# Allegro board SDR_2832 - crystal.brd
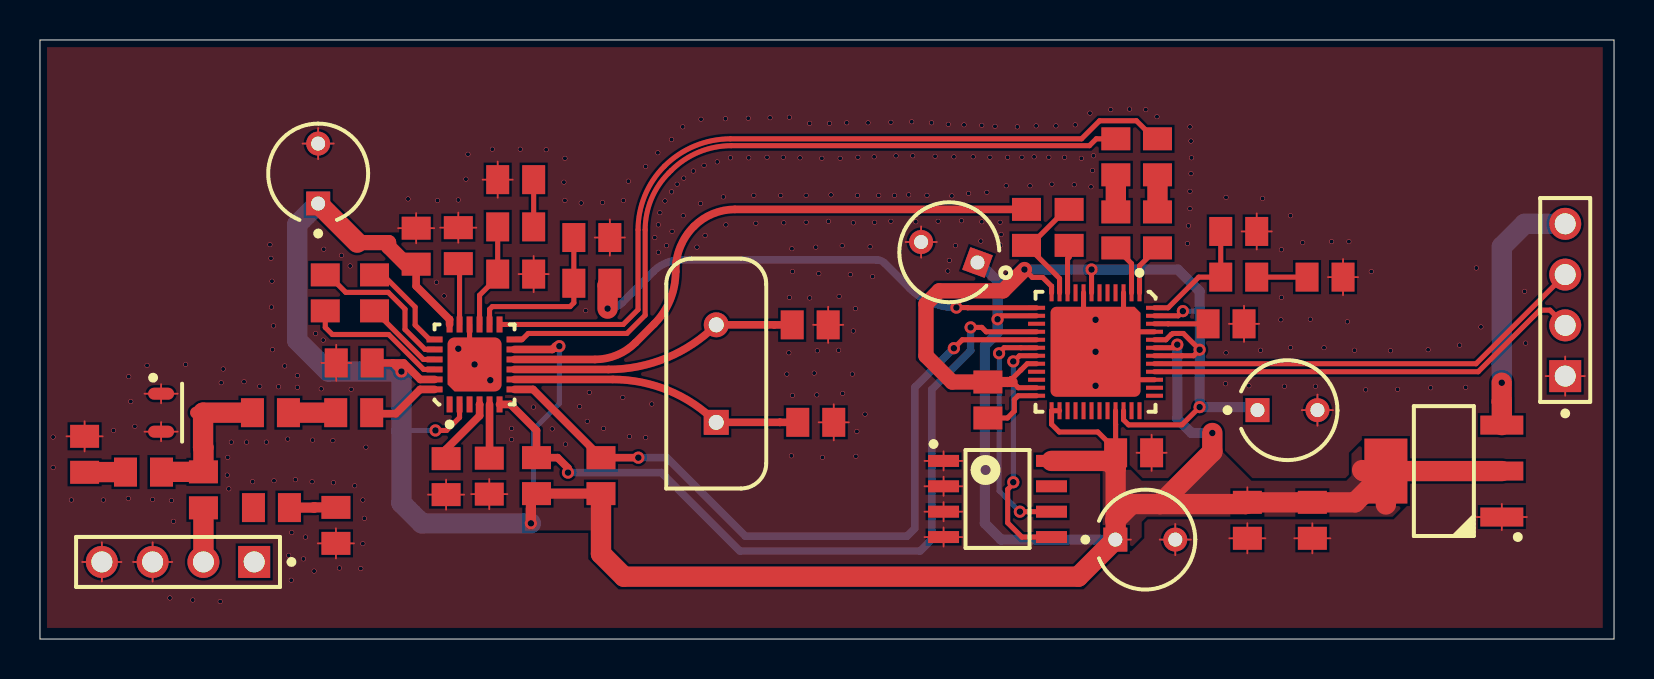
[diagram p0: board, top side]
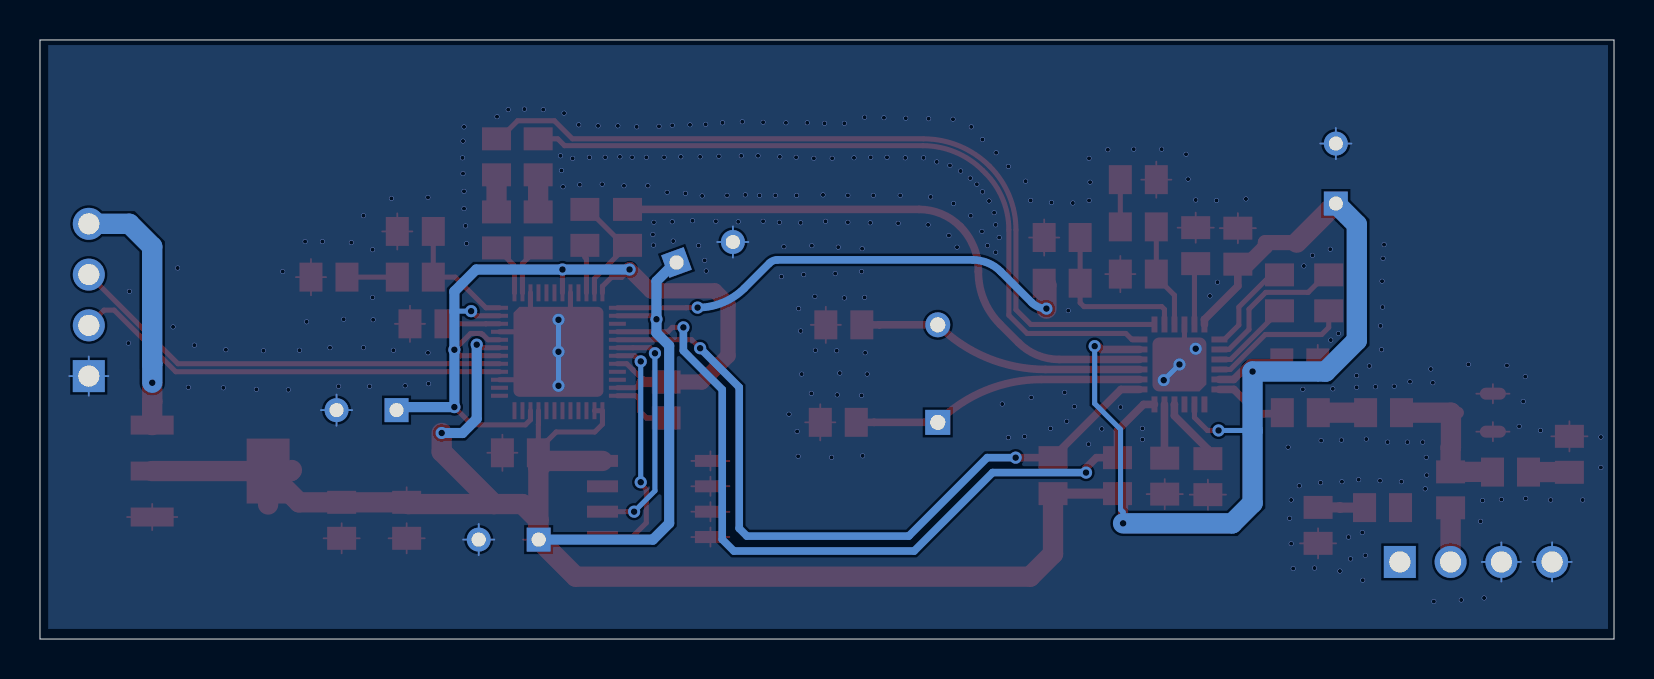
[diagram p1: board, bottom side, seen from below]

Outline 78.74 x 29.97 mm; copper layers: TOP, BOTTOM. Coordinates in mm from the lower left corner of the outline.
Outline path: 0,29.97 78.74,29.97 78.74,0 0,0 0,29.97

## Placement (name value [footprint] x y rotation side)
C1  330pF  [R0805]  11.53 11.33 0 top
C2  220pF/NC  [R0805]  2.23 9.24 270 top
C3  27pF/10nF  [R0805]  8.18 7.46 90 top
C4  NC/100nF  [R0805]  14.8 5.69 270 top
C5  1uF  [R0805]  20.32 8.12 90 top
C6  100nF  [R0805]  22.48 8.15 90 top
C7  20pF  [R0805]  38.81 10.84 180 top
C8  20pF  [R0805]  38.53 15.72 180 top
C9  10nF  [R0805]  15.72 13.81 180 top
C10  100nF  [R0805]  18.82 19.66 90 top
C11  100nF  [R0805]  20.93 19.68 270 top
C12  330nF  [R0805]  23.8 18.26 180 top
C13  6.8nF  [R0805]  23.8 22.98 0 top
C14  100nF  [R0805]  53.82 20.47 90 top
C15  100nF  [R0805]  55.9 20.47 90 top
C16  100nF  [R0805]  27.61 20.09 0 top
C17  220uF  [CAPPRD300W51D500H1295P]  62.4 11.45 0 top
C18  6.8nF/NC  [R0805]  49.35 20.6 90 top
C19  10uF  [CAPPRD300W51D500H1295P]  13.92 23.29 90 top
C20  0.1uF  [CAPPRD300W51D500H1295P]  55.29 4.98 0 top
C22  330nF  [R0805]  59.97 20.39 180 top
C23  6.8nF  [R0805]  64.28 18.11 180 top
C26  100nF  [R0805]  59.33 15.77 0 top
C27  100nF  [R0805]  54.71 9.32 180 top
C28  100nF  [R0805]  63.65 5.94 270 top
C29  330pF  [R0805]  60.4 5.94 90 top
C30  10uF  [CAPPRD300W51D500H1295P]  45.49 19.35 160 top
D1  BAV99/SOT  [SOT95P237X112-3N]  7.11 11.33 0 top
J1  HEADER 4  [HDRV4W64P254_1X4_1016X254X838P]  76.3 13.15 90 top
J2  HEADER 4  [HDRV4W64P254_1X4_1016X254X838P]  10.72 3.86 180 top
L1  8.2nH  [R0805]  15.69 11.33 0 top
L2  100nH/NC  [R0805]  5.18 8.35 0 top
L3  NC/180nH  [R0805]  11.58 6.58 0 top
L4  150nH  [R0805]  14.27 17.32 90 top
L5  150nH  [R0805]  16.74 17.32 90 top
L6  4.7uH  [R0805]  47.42 11.96 90 top
R2  1.8K  [R0805]  23.8 20.62 0 top
R3  10K  [R0805]  27.61 17.8 0 top
R4  220  [R0805]  55.9 24.13 270 top
R5  220  [R0805]  53.82 24.13 270 top
R7  NC/100  [R0805]  51.48 20.6 270 top
R8  1.8K  [R0805]  59.97 18.11 0 top
R9  4.7K  [R0805]  28.06 8.18 90 top
R10  4.7K  [R0805]  24.84 8.18 270 top
U1  RTL2832U  [RTL2832U_QFN48]  52.8 14.37 270 top
U2  R820t  [R820T]  21.74 13.74 90 top
U3  24C02/SO8  [AT24C02_SOP8]  47.9 7.01 0 top
U4  AMS1117  [AMS1117_SOT223]  70.23 8.4 180 top
Y1  28.8MHz  [OSC488W45P254L500H368Q2P]  33.83 13.28 90 top

## Library data of the parts
C1-C16 C18 C22 C23 C26-C29 = CAPACITOR NON-POL
C17 C19 C20 C30 = CAP
D1 = BAV99/SOT
J1 J2 = HEADER 4
L1-L6 = INDUCTOR AUDIO
R2-R5 R7-R10 = R
U1 = RTL2832U
U2 = R820t
U3 = 24C02/SO8_0
U4 = AMS1117
Y1 = CRYSTAL

## Footprints (pads in the part's own frame, mm; a bottom-side part is the same pattern mirrored in y, then rotated)
AMS1117_SOT223
  rect 2.15x0.95 smd: 1(-2.9,2.3) 2(-2.9,0) 3(-2.9,-2.3)
  rect 2.15x3.25 smd: 4(2.9,0)
AT24C02_SOP8
  rect 1.55x0.6 smd: 1(-2.7,1.905) 2(-2.7,0.635) 3(-2.7,-0.635) 4(-2.7,-1.905) 5(2.7,-1.905) 6(2.7,-0.635) 7(2.7,0.635) 8(2.7,1.905)
CAPPRD300W51D500H1295P
  rect 1.2x1.2 hole 0.7: 1(-1.5,0)
  round 1.2 hole 0.7: 2(1.5,0)
HDRV4W64P254_1X4_1016X254X838P
  rect 1.6x1.6 hole 1.05: 1(0,0)
  round 1.6 hole 1.05: 2(2.54,0) 3(5.08,0) 4(7.62,0)
OSC488W45P254L500H368Q2P
  rect 1.25x1.25 hole 0.75: 1(-2.44,0)
  round 1.25 hole 0.75: 2(2.44,0)
R0805
  rect 1.15x1.45 smd: 1(-0.9,0) 2(0.9,0)
R820T
  rect 0.8x0.3 smd: 1(-2,1.25) 2(-2,0.75) 3(-2,0.25) 4(-2,-0.25) 5(-2,-0.75) 6(-2,-1.25) 13(2,-1.25) 14(2,-0.75) 15(2,-0.25) 16(2,0.25) 17(2,0.75) 18(2,1.25)
  rect 0.3x0.8 smd: 7(-1.25,-2) 8(-0.75,-2) 9(-0.25,-2) 10(0.25,-2) 11(0.75,-2) 12(1.25,-2) 19(1.25,2) 20(0.75,2) 21(0.25,2) 22(-0.25,2) 23(-0.75,2) 24(-1.25,2)
  custom 2.7x2.7 smd: 25(0,0)
RTL2832U_QFN48
  rect 0.85x0.2 smd: 1(-2.95,2.2) 2(-2.95,1.8) 3(-2.95,1.4) 4(-2.95,1) 5(-2.95,0.6) 6(-2.95,0.2) 7(-2.95,-0.2) 8(-2.95,-0.6) 9(-2.95,-1) 10(-2.95,-1.4) 11(-2.95,-1.8) 12(-2.95,-2.2) 25(2.95,-2.2) 26(2.95,-1.8) 27(2.95,-1.4) 28(2.95,-1) 29(2.95,-0.6) 30(2.95,-0.2) 31(2.95,0.2) 32(2.95,0.6) 33(2.95,1) 34(2.95,1.4) 35(2.95,1.8) 36(2.95,2.2)
  rect 0.2x0.85 smd: 13(-2.2,-2.95) 14(-1.8,-2.95) 15(-1.4,-2.95) 16(-1,-2.95) 17(-0.6,-2.95) 18(-0.2,-2.95) 19(0.2,-2.95) 20(0.6,-2.95) 21(1,-2.95) 22(1.4,-2.95) 23(1.8,-2.95) 24(2.2,-2.95) 37(2.2,2.95) 38(1.8,2.95) 39(1.4,2.95) 40(1,2.95) 41(0.6,2.95) 42(0.2,2.95) 43(-0.2,2.95) 44(-0.6,2.95) 45(-1,2.95) 46(-1.4,2.95) 47(-1.8,2.95) 48(-2.2,2.95)
  custom 4.5x4.5 smd: 49(0,0)
SOT95P237X112-3N
  oval 1.3x0.6 smd: 1(-1.05,0.95) 2(-1.05,-0.95) 3(1.05,0)

## Nets
GND: C2.1 C4.2 C5.1 C6.1 C7.1 C8.1 C9.2 C10.2 C11.1 C12.1 C13.1 C16.2 C17.2 C19.2 C20.2 C22.1 C23.1 C26.2 C27.1 C28.2 C29.1 C30.2 D1.1 D1.2 J1.1 J2.3 J2.4 U1.3(GND_1) U1.8(GND_2) U1.39(GND_4) U1.45(GND_3) U1.49(PAD) U2.16(GND_16) U2.25(PAD) U3.1(A0) U3.2(A1) U3.3(A2) U3.4(GND) U4.1(GND)
VCC1V2: C17.1 L6.2 U1.7(1R2V_1) U1.12(1R2V_2) U1.20(1R2V_3) U1.23(FB1R2V) U1.34(1R2V_4) U1.42(1R2V_5) U1.44(1R2V_6) U1.47(1R2V_7)
VCC3V3: C9.1 C10.1 C19.1 C20.1 C27.2 C28.1 C29.2 C30.1 R9.1 R10.2 U1.14(3R3V_1) U1.25(DC_IN_1) U1.26(DC_IN_2) U1.33(3R3V_2) U1.43(3R3V_3) U2.2(VCC_2) U2.11(VCC_11) U2.18(VCC_18) U2.23(VCC_23) U3.8(VCC) U4.2(VOUT) U4.4(OUT)
AGC: R3.2 U1.13(AGC1)
ANT+5V: C4.1 L3.2
AUX_CLK: C18.2 U2.10(CLK_OUT)
IF_N: C14.1 U1.2(IF_N)
IF_P: C15.1 U1.1(IF_P)
RF_IN: C3.1 J2.2
SCL: R10.1 U1.16(SCLK1) U2.6(SCL)
SDA: R9.2 U1.17(SDA1) U2.7(SDA)
USB_5V: J1.4 U4.3(VIN)
USB_DM: J1.3 U1.41(USB_DM)
USB_DP: J1.2 U1.40(USB_DP)
N00923: R5.1 U2.12(IF_N)
N01579: L1.2 U2.24(RF_IN)
N01613: C1.2 L1.1
N01685: C1.1 C3.2 D1.3 L2.2
N01803: C2.2 L2.1
N02319: C5.2 U2.4(DET1)
N02329: C6.2 U2.5(DET2)
N02500: C8.2 U2.9(XTAL_O) Y1.2
N02507: C7.2 U2.8(XTAL_I) Y1.1
N03111: L4.1 U2.22(TF1P)
N03115: L5.1 U2.21(TF1N)
N03119: L5.2 U2.19(TF2N)
N03131: L4.2 U2.20(TF2P)
N03936: C11.2 U2.17(VDD_PLL)
N04054: C12.2 R2.1 U2.15(CP)
N04195: C13.2 R2.2
N04932: C16.1 R3.1 U2.14(IF_AGC)
N05012: R4.1 U2.13(IF_P)
N05567: C15.2 R4.2
N05644: C14.2 R5.2
N06557: L6.1 U1.24(DCSW)
N08567: C18.1 R7.1 U1.11(XTAL_I)
N08778: R7.2 U1.10(XTAL_O)
N09947: C26.1 U1.46(FLTC)
N10241: C22.2 R8.1 U1.48(FLTR)
N12143: C23.2 R8.2
N12664: U1.18(SCLK2) U3.6(SCL)
N12944: U1.19(SDA2) U3.5(SDA)

Pads without a net: J2 1; L3 1; U1 4 5 6 9 15 21 22 27 28 29 30 31 32 35 36 37 38; U2 1 3; U3 7

## Via types
v1: diameter 0.61, hole 0.33, TOP to BOTTOM, 29 vias
v2: diameter 0.24, hole 0.21, TOP to BOTTOM, 269 vias

## Routing (per net, layer and track width the routed paths; a pad name or vN(x,y) marks a point on that pad's centre or on a via; arc(x,y) is an arc through that point)
GND: length 148.1
  TOP w0.089: 71.87,6.1 U4.1 ; U4.1 74.38,6.1 ; U4.1 73.13,5.45 ; U4.1 73.13,6.76 ; 22.14,22.98 C13.1 ; C13.1 22.9,22.08 ; C13.1 23.65,22.98 ; C13.1 22.9,23.89 ; C9.2 14.82,14.72 ; C9.2 14.82,12.91 ; C9.2 14.07,13.81 ; C9.2 15.57,13.81 ; C26.2 60.98,15.77 ; C26.2 60.23,16.67 ; C26.2 60.23,14.87 ; C26.2 59.48,15.77 ; C5.1 21.22,7.22 ; C5.1 20.32,7.98 ; C5.1 20.32,6.47 ; C5.1 19.41,7.22 ; C12.1 25.45,18.26 ; C12.1 24.7,17.36 ; C12.1 24.7,19.16 ; C12.1 23.94,18.26 ; 18.82,19.8 C10.2 ; C10.2 18.82,21.31 ; C10.2 17.91,20.56 ; C10.2 19.72,20.56 ; 3.1,2.88 J2.4 ; J2.4 3.1,4.84 ; J2.4 2.12,3.86 ; J2.4 4.07,3.86 ; 2.23,9.39 C2.1 ; C2.1 3.14,10.14 ; C2.1 2.23,10.9 ; C2.1 1.33,10.14 ; 6.06,11.8 D1.1 ; D1.1 5.23,12.28 ; D1.1 6.06,12.75 ; D1.1 6.89,12.28 ; D1.2 6.89,10.38 ; D1.2 6.06,9.9 ; D1.2 6.06,10.85 ; D1.2 5.23,10.38 ; C22.1 61.62,20.39 ; C22.1 60.87,19.49 ; C22.1 60.11,20.39 ; C22.1 60.87,21.3 ; C29.1 61.3,5.04 ; C29.1 60.4,4.29 ; C29.1 60.4,5.79 ; C29.1 59.49,5.04 ; 44.25,5.1 U3.4 ; U3.4 45.2,5.58 ; U3.4 46.15,5.1 ; U3.4 45.2,4.62 ; 54.85,9.32 C27.1 ; C27.1 55.61,10.22 ; C27.1 56.36,9.32 ; C27.1 55.61,8.42 ; C4.2 14.8,5.54 ; C4.2 13.9,4.79 ; C4.2 14.8,4.03 ; C4.2 15.71,4.79 ; 5.64,2.88 J2.3 ; J2.3 4.66,3.86 ; J2.3 5.64,4.84 ; J2.3 6.61,3.86 ; 76.3,12.18 J1.1 ; J1.1 75.32,13.15 ; J1.1 76.3,14.13 ; J1.1 77.28,13.15 ; 38.68,15.72 C8.1 ; C8.1 39.43,16.62 ; C8.1 39.43,14.82 ; C8.1 40.18,15.72 ; C7.1 40.46,10.84 ; C7.1 38.95,10.84 ; C7.1 39.71,9.94 ; C7.1 39.71,11.75 ; 13.14,24.79 C19.2 ; C19.2 13.92,24.01 ; C19.2 13.92,25.57 ; C19.2 14.69,24.79 ; 44.25,6.37 U3.3 ; U3.3 45.2,6.85 ; U3.3 45.2,5.89 ; U3.3 46.15,6.37 ; 27.75,20.09 C16.2 ; C16.2 29.26,20.09 ; C16.2 28.51,20.99 ; C16.2 28.51,19.18 ; C11.1 21.83,20.58 ; C11.1 20.93,21.33 ; C11.1 20.93,19.83 ; C11.1 20.02,20.58 ; 63.13,11.45 C17.2 ; C17.2 63.9,12.23 ; C17.2 64.68,11.45 ; C17.2 63.9,10.67 ; 45.2,8.43 U3.1 ; U3.1 44.25,8.91 ; U3.1 46.15,8.91 ; U3.1 45.2,9.39 ; 45.2,7.16 U3.2 ; U3.2 46.15,7.64 ; U3.2 45.2,8.12 ; U3.2 44.25,7.64 ; C30.2 44.08,20.64 ; C30.2 44.86,19.86 ; C30.2 44.08,19.09 ; C30.2 43.3,19.86 ; C23.1 65.94,18.11 ; C23.1 64.43,18.11 ; C23.1 65.18,19.01 ; C23.1 65.18,17.2 ; C20.2 57.57,4.98 ; C20.2 56.01,4.98 ; C20.2 56.79,4.2 ; C20.2 56.79,5.75 ; C6.1 22.48,8 ; C6.1 22.48,6.5 ; C6.1 21.57,7.25 ; C6.1 23.38,7.25 ; 62.75,5.04 C28.2 ; C28.2 63.65,5.79 ; C28.2 64.55,5.04 ; C28.2 63.65,4.29
  TOP w0.254: 21.49,13.99 U2.16 ; 21.49,13.99 v1(21.74,13.74) ; 21.49,13.99 20.95,14.53 v1(20.93,14.53) ; U1.39 54.2,12.97 v1(52.8,14.37) ; U1.8 52.2,14.97 v1(52.8,14.37) ; U1.45 53.8,15.37 ; 53.8,15.37 v1(52.8,14.37) ; 53.8,15.37 54.2,15.77 U1.3
  TOP w0.508: 20.9,20.56 C11.1
  BOTTOM w0.089: C30.2 44.08,20.64 ; C30.2 44.08,19.09 ; C30.2 44.86,19.86 ; C30.2 43.3,19.86 ; 56.79,4.2 C20.2 ; C20.2 56.01,4.98 ; C20.2 56.79,5.75 ; C20.2 57.57,4.98 ; 76.3,12.18 J1.1 ; J1.1 77.28,13.15 ; J1.1 76.3,14.13 ; J1.1 75.32,13.15 ; 2.12,3.86 J2.4 ; J2.4 3.1,2.88 ; J2.4 4.07,3.86 ; J2.4 3.1,4.84 ; 4.66,3.86 J2.3 ; J2.3 5.64,4.84 ; J2.3 6.61,3.86 ; J2.3 5.64,2.88 ; C17.2 64.68,11.45 ; C17.2 63.9,10.67 ; C17.2 63.9,12.23 ; C17.2 63.13,11.45 ; C19.2 13.92,25.57 ; C19.2 13.92,24.01 ; C19.2 13.14,24.79 ; C19.2 14.69,24.79
  BOTTOM w0.254: v1(52.8,15.97) v1(52.8,14.37) v1(52.8,12.67) ; v1(21.74,13.74) v1(22.53,12.95)
  vias: v2(0.66,10.11) v2(0.66,8.58) v2(1.57,6.96) v2(3.17,6.96) v2(3.68,10.44) v2(4.44,13.13) v2(4.42,7.03) v2(4.54,11.88) v2(4.75,10.64) v2(5.36,13.69) v2(5.64,6.98) v2(6.5,2.05) v2(6.58,6.93) v2(6.68,5.89) v2(7.29,13.74) v2(7.64,1.95) v2(9.06,12.82) v2(9.01,1.88) v2(9.17,13.51) v2(9.39,9.09) v2(9.37,8.2) v2(9.45,7.52) v2(9.57,9.85) v2(10.21,12.87) v2(10.33,9.85) v2(10.64,7.87) v2(10.99,12.65) v2(11.33,9.85) v2(11.5,19.73) v2(11.55,19.05) v2(11.58,16.61) v2(11.6,17.9) v2(11.68,15.67) v2(11.63,14.47) v2(11.71,7.92) v2(11.93,12.62) v2(12.24,13.66) v2(12.39,10) v2(12.44,4.19) v2(12.6,5.33) v2(12.57,2.94) v2(12.77,7.97) v2(12.87,13.18) v2(12.87,12.6) v2(13.18,4.01) v2(13.28,5.1) v2(13.64,9.95) v2(13.61,7.87) v2(13.79,15.29) v2(13.71,3.4) v2(14.07,12.52) v2(14.2,19.5) v2(14.17,14.96) v2(14.65,9.93) v2(14.68,7.82) v2(14.98,3.55) v2(15.08,19.2) v2(15.52,18.67) v2(15.57,12.49) v2(15.74,7.67) v2(16.05,3.53) v2(16.15,6.96) v2(16.15,4.77) v2(16.23,6.04) v2(16.3,9.6) v2(18.41,22.02) v2(19.88,21.94) v2(19.83,17.85) v2(20.22,17.17) v2(20.93,21.97) v2(21.31,23.01) v2(21.41,24.25) v2(22.63,24.51) v2(23.59,10.54) v2(23.59,9.98) v2(24.03,24.51) v2(24.69,11.6) v2(25.32,24.48) v2(25.63,10.51) v2(26.26,24.05) v2(26.21,22.86) v2(26.26,21.94) v2(26.29,9.75) v2(27,11.63) v2(27.07,21.82) v2(27.3,16.43) v2(27.38,10.89) v2(27.48,12.34) v2(28.14,21.84) v2(28.19,10.54) v2(29.18,21.94) v2(29.16,12.09) v2(29.44,22.91) v2(29.49,10.13) v2(30.3,23.64) v2(30.3,10.08) v2(30.6,11.76) v2(30.76,20.09) v2(30.91,24.33) v2(30.93,20.72) v2(30.93,19.35) v2(31.01,21.33) v2(31.26,21.92) v2(31.34,19.68) v2(31.59,24.99) v2(31.59,22.37) v2(31.62,20.39) v2(31.87,22.76) v2(32.15,25.63) v2(32.18,21.18) v2(32.2,23.06) v2(32.69,23.42) v2(32.86,19.61) v2(33.07,26.01) v2(33.04,21.79) v2(33.22,23.69) v2(33.27,20.19) v2(33.88,23.87) v2(34.19,22.12) v2(34.29,26.03) v2(34.31,20.72) v2(34.54,24.08) v2(35.43,26.06) v2(35.46,24.08) v2(35.71,22.2) v2(35.81,20.8) v2(36.37,24.1) v2(36.52,26.08) v2(37.06,22.2) v2(37.18,24.1) v2(37.21,20.82) v2(37.36,13.26) v2(37.49,26.11) v2(37.49,17.09) v2(37.46,14.32) v2(37.59,9.17) v2(37.61,19.53) v2(37.64,18.39) v2(37.64,12.19) v2(38.02,24.08) v2(38.33,22.2) v2(38.33,20.85) v2(38.5,25.8) v2(38.5,17.07) v2(38.73,13.31) v2(38.81,19.61) v2(38.88,14.42) v2(38.86,12.21) v2(38.96,18.28) v2(39.11,24.05) v2(39.14,9.09) v2(39.49,25.8) v2(39.44,20.9) v2(39.57,22.22) v2(39.98,17.14) v2(39.95,14.45) v2(40.03,24.05) v2(40.13,19.68) v2(40.15,12.29) v2(40.36,25.83) v2(40.54,18.23) v2(40.69,20.82) v2(40.69,15.41) v2(40.64,13.26) v2(40.79,16.53) v2(40.89,22.2) v2(40.87,10.39) v2(40.81,9.14) v2(40.92,24.1) v2(41.27,11.25) v2(41.42,25.83) v2(41.53,19.63) v2(41.65,18.13) v2(41.73,24.13) v2(41.75,20.85) v2(41.96,22.2) v2(42.57,25.85) v2(42.57,20.9) v2(42.74,22.2) v2(42.82,24.18) v2(43.46,22.22) v2(43.61,25.88) v2(43.66,24.18) v2(43.81,20.88) v2(44.37,22.2) v2(44.6,25.83) v2(44.78,24.15) v2(44.93,20.9) v2(45.44,25.75) v2(45.49,18.95) v2(45.41,18.41) v2(45.62,22.17) v2(45.72,24.13) v2(45.79,19.68) v2(46.1,20.93) v2(46.22,25.73) v2(46.45,22.3) v2(46.68,24.13) v2(47.06,19.91) v2(47.11,25.7) v2(47.11,20.88) v2(47.37,22.35) v2(47.52,24.1) v2(47.77,25.65) v2(48.03,20.85) v2(48.08,20.24) v2(48.05,19.71) v2(48.33,22.68) v2(48.41,24.1) v2(48.89,25.63) v2(49.12,24.1) v2(49.53,22.68) v2(49.73,24.13) v2(49.83,25.68) v2(50.47,24.1) v2(50.62,22.76) v2(50.82,25.68) v2(51.25,24.1) v2(51.79,25.73) v2(51.74,22.73) v2(52.09,24.05) v2(52.52,26.31) v2(52.57,22.63) v2(52.7,24.18) v2(52.65,23.44) v2(53.57,26.49) v2(54.51,26.51) v2(55.32,26.49) v2(55.88,26.13) v2(57.4,19.78) v2(57.45,20.67) v2(57.53,25.63) v2(57.58,24.91) v2(57.58,23.29) v2(57.53,22.4) v2(57.53,21.54) v2(57.6,24.08) v2(59.33,22.09) v2(59.33,14.32) v2(59.31,12.77) v2(60.47,12.67) v2(61.06,14.45) v2(61.16,22.04) v2(62.1,19.48) v2(62.1,17.09) v2(62.07,15.97) v2(62.25,12.65) v2(62.56,21.18) v2(62.56,14.58) v2(63.17,19.83) v2(63.55,16) v2(63.8,12.65) v2(64.23,14.58) v2(64.61,19.88) v2(65.4,15.87) v2(65.48,19.88) v2(65.76,14.45) v2(66.32,12.47) v2(66.6,18.39) v2(67.56,14.42) v2(67.92,12.49) v2(69.44,14.47) v2(69.57,12.57) v2(71.02,14.7) v2(71.32,12.6) v2(71.85,18.56) v2(72.08,15.62) v2(74.27,17.4) v2(74.32,14.8)
VCC1V2: length 49.6
  TOP w0.254: U1.34 54.2,10.97 54.46,10.72 57.12,10.72 v1(58.01,11.6) ; U1.20 49.39,13.77 49.07,13.46 49.07,13.46 48.64,13.03 48.56,13.03 48.4,12.86 ; U1.42 56.66,14.17 56.66,14.17 57.12,14.17 57.13,14.17 57.71,14.17 v1(58.01,14.47) 57.2,15.29 56.66,15.29 56.61,15.24 56.59,15.24 56.32,14.97 U1.44 ; U1.7 v1(52.6,18.49) ; 48.65,12.86 48.94,12.57 U1.23 ; v1(57.17,16.41) 56.94,16.17 U1.47 ; U1.12 50.6,17.65 50.16,18.09 49.64,18.09 v1(49.25,18.49)
  TOP w0.508: 48.65,12.86 L6.2
  TOP w0.762: v1(49.25,18.49) 48.18,17.42 44.98,17.42 44.32,16.76 44.32,14.17 45.63,12.86 L6.2
  BOTTOM w0.254: v1(57.17,16.41) 58.01,16.41
  BOTTOM w0.508: v1(49.25,18.49) v1(52.6,18.49) 56.92,18.49 58.01,17.4 v1(58.01,14.47) v1(58.01,11.6) 60.75,11.6 C17.1
VCC3V3: length 166.9
  TOP w0.089: 53.79,5.75 C20.1 54.57,4.98 ; 59.49,6.84 C29.2 60.4,7.59
  TOP w0.254: U1.43 56.74,14.57 v1(56.89,14.73) ; v1(25.98,14.65) 25.82,14.49 25.63,14.49 ; U2.2 20.99,11.08 20.34,10.44 v1(19.78,10.44) ; U1.14 48.08,16.17 v1(47.9,16) ; U1.33 53.8,10.74 53.81,10.74 53.81,9.47 ; 53.81,9.47 C27.2 ; 53.81,9.47 52.92,10.36 50.99,10.36 50.6,10.74 U1.25 U1.26
  TOP w0.381: v1(25.98,14.65) 25.79,14.65 25.63,14.49 U2.11 ; U2.23 19.02,12.99 18.2,13.81 17.65,13.81 ; C9.1 17.65,13.81 ; 17.65,13.81 v1(18.08,13.38) ; U2.18 20.49,15.99 18.82,17.66 C10.1
  TOP w0.508: C10.1 18.31,18.76 ; R9.1 R10.2 24.56,7 v1(24.56,5.79) ; 53.81,5.97 53.79,5.96 53.79,5.94
  TOP w0.762: 15.87,19.83 17.44,19.83 17.44,19.63 18.31,18.76
  TOP w1.016: 67.33,8.38 65.78,6.84 C28.1 C29.2 60.31,6.75 56.03,6.75 ; 67.33,8.38 U4.4 ; 67.33,8.38 67.33,6.73 ; U4.4 U4.2 ; U4.4 66.19,8.4 66.14,8.45 ; R9.1 28.06,4.26 29.21,3.12 51.94,3.12 C20.1 53.81,4.99 53.81,8.56 ; 53.81,8.56 53.45,8.91 U3.8 ; 53.81,8.56 C27.2 ; 53.79,5.94 54.61,6.75 56.03,6.75 ; 56.03,6.75 58.65,9.37 v1(58.65,10.31) ; 15.87,19.83 C19.1
  BOTTOM w0.254: 18.08,10.41 18.11,10.44 v1(19.78,10.44) ; v1(25.98,14.65) 25.98,11.78 24.69,10.49 24.69,6.47 24.56,6.35 v1(24.56,5.79)
  BOTTOM w0.381: 47.06,18.74 46.97,18.84 C30.1
  BOTTOM w0.508: 47.06,18.74 47.9,17.9 v1(47.9,16) 47.9,15.31 47.27,14.68 47.27,5.79 48.08,4.98 C20.1 ; v1(58.65,10.31) 57.6,10.31 56.89,11.02 v1(56.89,14.73)
  BOTTOM w1.016: v1(24.56,5.79) 19.1,5.79 18.08,6.8 v1(18.08,13.38) 14.42,13.38 12.87,14.94 12.87,20.74 C19.1
AGC: length 24.5
  TOP w0.254: v1(45.84,16.58) 46.4,16.58 46.41,16.57 U1.13
  TOP w1.016: R3.2 28.39,17.69 v1(28.39,16.53)
  BOTTOM w0.381: v1(28.39,16.53) arc(28.79,16.61) 29.13,16.84 30.68,18.39 arc(31.33,18.82) 32.09,18.97 41.86,18.97 arc(42.07,18.93) 42.25,18.81 43.5,17.55 arc(44.58,16.83) v1(45.84,16.58)
ANT+5V: length 2.3
  TOP w0.381: 13.76,6.59 13.75,6.58
  TOP w0.508: L3.2 13.69,6.58 13.7,6.59 C4.1
AUX_CLK: length 29.9
  TOP w0.381: U2.10 27.76,13.99 arc(28.86,14.21) 29.79,14.83 30.72,15.76 arc(31.52,16.95) 31.8,18.36 31.8,18.44 arc(32.04,19.63) 32.71,20.65 arc(33.65,21.28) 34.76,21.5 C18.2
IF_N: length 2.6
  TOP w0.254: U1.2 54.6,18.79 C14.1
IF_P: length 2.6
  TOP w0.254: C15.1 55,18.67 U1.1
RF_IN: length 2.7
  TOP w1.016: C3.1 J2.2
SCL: length 40.6
  TOP w0.254: v1(46.55,15.59) 47.11,15.59 47.33,15.37 U1.16
  TOP w0.381: v1(26.41,8.33) 26.41,8.56 25.89,9.08 R10.1 24.84,10.44 23.54,11.74 U2.6
  BOTTOM w0.381: v1(26.41,8.33) 31.09,8.33 35.01,4.4 44.03,4.4 44.61,4.99 44.61,12.48 46.55,14.42 v1(46.55,15.59)
SDA: length 37.4
  TOP w0.254: v1(45.72,14.55) 46.14,14.97 U1.17
  TOP w0.381: U2.7 24.67,12.49 28.04,9.12 28.04,9.1 R9.2 v1(29.93,9.08)
  BOTTOM w0.381: v1(29.93,9.08) 31.35,9.08 35.28,5.15 43.38,5.15 43.76,5.53 43.76,12.6 v1(45.72,14.55)
USB_5V: length 12.6
  TOP w1.016: U4.3 73.13,11.88 73.12,11.88 v1(73.12,12.82)
  BOTTOM w1.016: v1(73.12,12.82) 73.12,13.76 73.13,13.77 73.13,19.64 74.27,20.77 J1.4
USB_DM: length 22.4
  TOP w0.254: J1.3 71.84,13.77 U1.41
USB_DP: length 22.1
  TOP w0.254: J1.2 75.54,16.46 75.03,16.46 71.95,13.37 U1.40
N00923: length 37.4
  TOP w0.254: R5.1 52.84,25.03 52.5,24.68 34.58,24.68 arc(32.95,24.36) 31.58,23.44 31.45,23.32 arc(30.58,22.01) 30.27,20.47 30.27,16.2 29.36,15.29 24.42,15.29 24.12,14.99 U2.12
N01579: length 3.7
  TOP w0.381: L1.2 16.64,11.27 17.8,11.27 19.02,12.49 U2.24
N01613: length 2.4
  TOP w1.016: L1.1 C1.2
N01685: length 7.5
  TOP w1.016: C1.1 D1.3 8.16,9.59 8.18,9.57 C3.2 6.09,8.36 L2.2
N01803: length 2.1
  TOP w1.016: L2.1 2.24,8.35 C2.2
N02319: length 3.4
  TOP w0.381: U2.4 21.99,11.73 21.99,11.17 20.32,9.5 C5.2
N02329: length 2.7
  TOP w0.381: U2.5 22.49,9.06 C6.2
N02500: length 14.5
  TOP w0.381: U2.9 28.44,13.49 arc(31.36,14.07) Y1.2 36.73,15.72 36.74,15.72 C8.2
N02507: length 14.7
  TOP w0.381: U2.8 28.65,12.99 arc(31.45,12.43) Y1.1 37.01,10.84 37.02,10.84 C7.2
N03111: length 7.2
  TOP w0.254: L4.1 14.27,15.59 14.63,15.24 17.44,15.24 19.19,13.49 U2.22
N03115: length 4.1
  TOP w0.254: L5.1 16.75,16.42 ; 16.75,16.42 19.18,13.99 U2.21 ; 16.75,16.42 16.74,16.43 16.68,16.43
N03119: length 4.9
  TOP w0.254: L5.2 16.75,18.21 17.17,18.21 18.77,16.61 18.77,15.71 19.49,14.99 U2.19
N03131: length 7.6
  TOP w0.254: U2.20 19.26,14.49 18.26,15.49 18.26,16.51 17.42,17.34 15.3,17.34 14.42,18.22 L4.2
N03936: length 3.1
  TOP w0.254: C11.2 20.98,18.73 20.98,18.28 20.99,18.27 U2.17
N04054: length 5.3
  TOP w0.254: U2.15 21.99,17.2 22.9,18.11 C12.2 R2.1
N04195: length 2.4
  TOP w0.254: R2.2 C13.2
N04932: length 8.4
  TOP w0.254: U2.14 22.49,16.49 22.63,16.63 26.52,16.63 26.71,16.82 R3.1 C16.1
N05012: length 40.5
  TOP w0.254: R4.1 55.75,25.03 54.85,25.93 53.01,25.93 52.1,25.03 34.54,25.03 arc(32.75,24.67) 31.24,23.66 arc(30.26,22.2) 29.92,20.47 29.92,16.48 29.17,15.74 U2.13
N05567: length 1.9
  TOP w1.016: R4.2 C15.2
N05644: length 1.9
  TOP w1.016: R5.2 C14.2
N06557: length 3.2
  TOP w0.254: U1.24 48.93,12.17 48.74,11.98 48.74,11.4 48.4,11.06 L6.1
N08567: length 5.9
  TOP w0.254: R7.1 51.33,21.5 49.53,19.7 C18.1 51,18.04 U1.11
N08778: length 2.4
  TOP w0.254: U1.10 51.4,19.02 51.48,19.1 R7.2
N09947: length 2.7
  TOP w0.254: C26.1 56.44,15.77 56.43,15.77 U1.46
N10241: length 6.2
  TOP w0.254: C22.2 R8.1 57.97,18.11 56.43,16.57 U1.48
N12143: length 2.5
  TOP w0.254: C23.2 R8.2
N12664: length 11.9
  TOP w0.254: U1.18 49.08,14.57 49.07,14.58 48.23,14.58 47.98,14.32 v1(47.98,14.3) ; v1(49.02,6.37) U3.6
  BOTTOM w0.254: v1(49.02,6.37) 47.98,7.41 v1(47.98,14.3)
N12944: length 12
  TOP w0.254: v1(48.69,13.89) 48.71,13.89 49,14.17 U1.19 ; U3.5 49.12,5.1 48.41,5.81 48.41,7.49 48.69,7.77 v1(48.69,7.85)
  BOTTOM w0.254: v1(48.69,13.89) v1(48.69,7.85)

## Copper pours and planes (outline as drawn; the poured copper is in the pictures)
GND on TOP: 0.35,29.61 0.35,0.56 78.18,0.56 78.18,29.61 ; 8 cut-outs
GND on BOTTOM: 0.3,0.5 0.3,29.72 78.33,29.72 78.33,0.5 ; 2 cut-outs
VCC3V3 on TOP: 24.25,7.44 24.25,5.43 28.32,5.43 28.32,7.44
VCC3V3 on TOP: 53.16,8.79 53.16,4.7 53.34,4.52 54.53,4.52 55.11,5.1 55.11,5.86 55.37,6.12 67.66,6.12 68.35,6.8 68.35,9.39 67.81,9.93 66.27,9.93 65.6,9.27 65.6,8.18 65.35,7.92 60.6,7.92 58.67,9.85 56.97,8.15 56.97,7.92 55.11,7.92 54,9.04 53.41,9.04

## Text on the board
DISPLAY_TOP: FIGURE | SIZE | 8.27 | 13.0 | 27.56 | 29.53 | 41.34 | DRILL CHART: TOP to BOTTOM | ALL UNITS ARE IN MILS | PLATED | QTY | 269 | 30 | 4 | 1 | 2 | 6
